# EAGLE board RGBDisplayDriver (EAGLE 7.3.0)
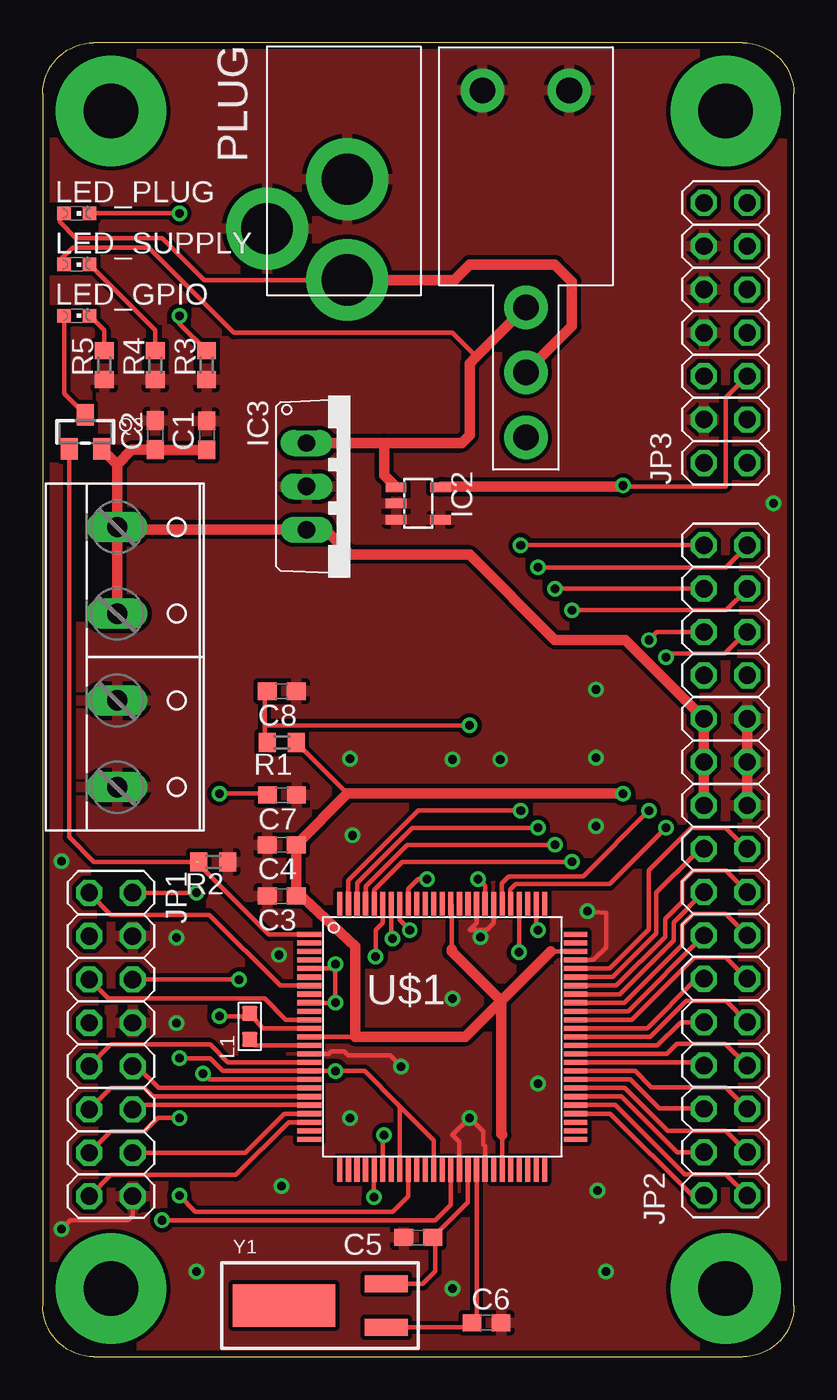
[diagram p0: board, top side]
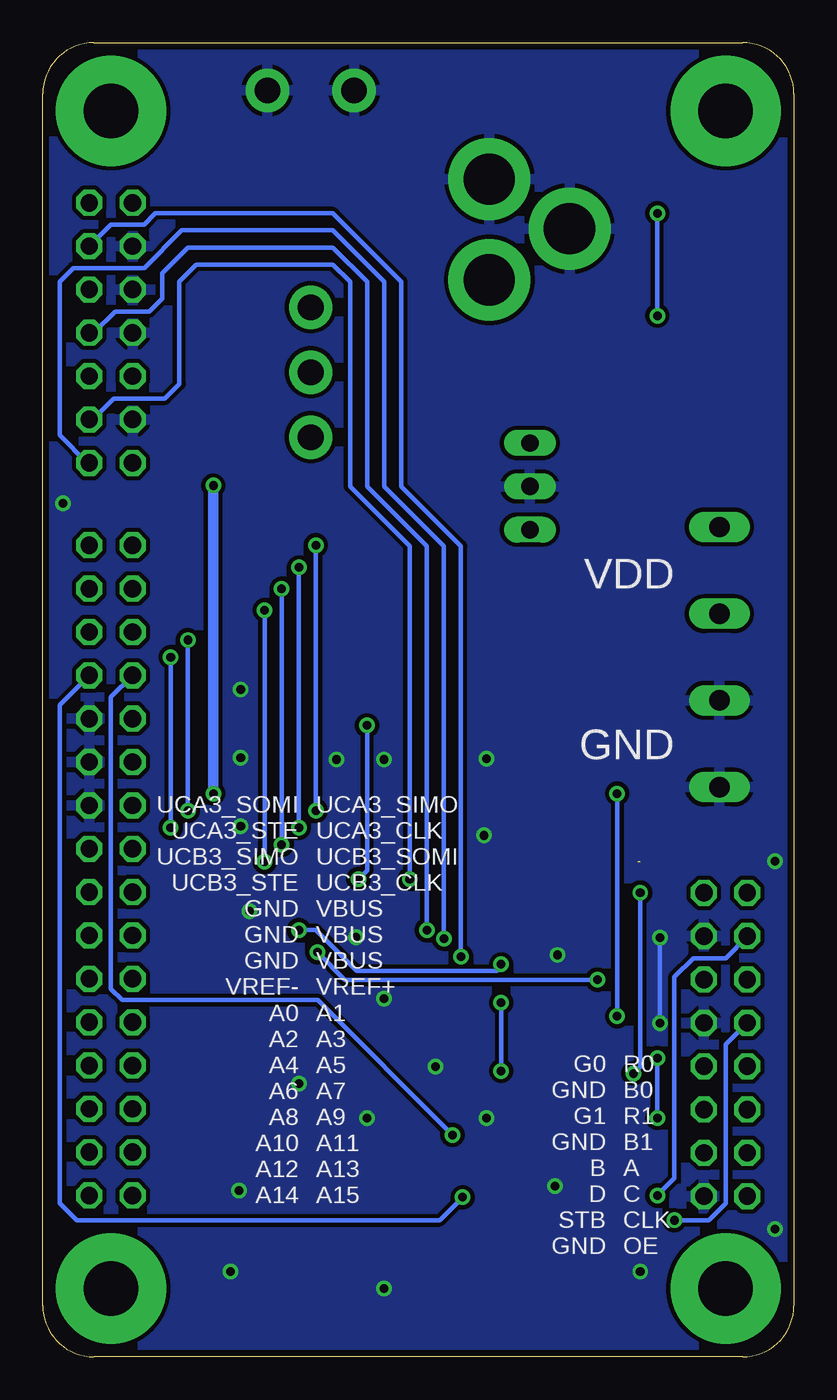
[diagram p1: board, bottom side, seen from below]

Size 44 x 77 mm. Coordinates in mm from the lower left corner, seen from the top.
Outline: 3,0 41,0 arc90 44,3 44,74 arc90 41,77 3,77 arc90 0,74 0,3 arc90 3,0
Copper layers (1*16): Top 0.035mm / dielectric 1.5mm / Bottom 0.035mm
Design rules "default *": minimum track width 6mil, minimum drill 13mil, track to track 6mil, track to pad 6mil, pad to pad 6mil, via to via 6mil, smd to smd 6mil, copper to edge 15mil, drill to drill 8mil, minimum pad ring 10mil, minimum via ring 8mil, stop-mask expansion 4mil, vias tented up to drill 20mil, thermal gap 10mil

## Footprints (pad centres in the part's own frame; a part is rotated, then mirrored left to right if it is on the bottom)
C0603 = smd 1.1 x 1: 1 -0.85,0; 2 0.85,0
SOT23-DBV = smd 0.55 x 1.2: 1 -0.95,-1.3; 2 0,-1.3; 3 0.95,-1.3; 4 0.95,1.3; 5 -0.95,1.3
TO220V = drill 1.016 long: 1 -2.54,-2.54; 2 0,-2.54; 3 2.54,-2.54
2X08 = drill 1.016 octagon: 1 -8.89,-1.27; 2 -8.89,1.27; 3 -6.35,-1.27; 4 -6.35,1.27; 5 -3.81,-1.27; 6 -3.81,1.27; 7 -1.27,-1.27; 8 -1.27,1.27; 9 1.27,-1.27; 10 1.27,1.27; 11 3.81,-1.27; 12 3.81,1.27; 13 6.35,-1.27; 14 6.35,1.27; 15 8.89,-1.27; 16 8.89,1.27
2X16 = drill 1.016 octagon: 1 -19.05,-1.27; 2 -19.05,1.27; 3 -16.51,-1.27; 4 -16.51,1.27; 5 -13.97,-1.27; 6 -13.97,1.27; 7 -11.43,-1.27; 8 -11.43,1.27; 9 -8.89,-1.27; 10 -8.89,1.27; 11 -6.35,-1.27; 12 -6.35,1.27; 13 -3.81,-1.27; 14 -3.81,1.27; 15 -1.27,-1.27; 16 -1.27,1.27; 17 1.27,-1.27; 18 1.27,1.27; 19 3.81,-1.27; 20 3.81,1.27; 21 6.35,-1.27; 22 6.35,1.27; 23 8.89,-1.27; 24 8.89,1.27; 25 11.43,-1.27; 26 11.43,1.27; 27 13.97,-1.27; 28 13.97,1.27; 29 16.51,-1.27; 30 16.51,1.27; 31 19.05,-1.27; 32 19.05,1.27
2X07 = drill 1.016 octagon: 1 -7.62,-1.27; 2 -7.62,1.27; 3 -5.08,-1.27; 4 -5.08,1.27; 5 -2.54,-1.27; 6 -2.54,1.27; 7 0,-1.27; 8 0,1.27; 9 2.54,-1.27; 10 2.54,1.27; 11 5.08,-1.27; 12 5.08,1.27; 13 7.62,-1.27; 14 7.62,1.27
L0603 = smd 0.889 x 0.889: 1 -0.762,0; 2 0.762,0
CHIPLED_0603 = smd 0.8 x 0.8: A 0,-0.75; C 0,0.75
SOT23-WIDE = smd 1 x 1.27: 1 -0.95,-1; 2 0.95,-1; 3 0,1
R0603 = smd 1 x 1.1: 1 -0.85,0; 2 0.85,0
LQFP100 = smd 1.4 x 0.3: 1 -7.8,6; 2 -7.8,5.5; 3 -7.8,5; 4 -7.8,4.5; 5 -7.8,4; 6 -7.8,3.5; 7 -7.8,3; 8 -7.8,2.5; 9 -7.8,2; 10 -7.8,1.5; 11 -7.8,1; 12 -7.8,0.5; 13 -7.8,0; 14 -7.8,-0.5; 15 -7.8,-1; 16 -7.8,-1.5; 17 -7.8,-2; 18 -7.8,-2.5; 19 -7.8,-3; 20 -7.8,-3.5; 21 -7.8,-4; 22 -7.8,-4.5; 23 -7.8,-5; 24 -7.8,-5.5; 25 -7.8,-6; 51 7.8,-6; 52 7.8,-5.5; 53 7.8,-5; 54 7.8,-4.5; 55 7.8,-4; 56 7.8,-3.5; 57 7.8,-3; 58 7.8,-2.5; 59 7.8,-2; 60 7.8,-1.5; 61 7.8,-1; 62 7.8,-0.5; 63 7.8,0; 64 7.8,0.5; 65 7.8,1; 66 7.8,1.5; 67 7.8,2; 68 7.8,2.5; 69 7.8,3; 70 7.8,3.5; 71 7.8,4; 72 7.8,4.5; 73 7.8,5; 74 7.8,5.5; 75 7.8,6 | smd 0.3 x 1.4: 26 -6,-7.8; 27 -5.5,-7.8; 28 -5,-7.8; 29 -4.5,-7.8; 30 -4,-7.8; 31 -3.5,-7.8; 32 -3,-7.8; 33 -2.5,-7.8; 34 -2,-7.8; 35 -1.5,-7.8; 36 -1,-7.8; 37 -0.5,-7.8; 38 0,-7.8; 39 0.5,-7.8; 40 1,-7.8; 41 1.5,-7.8; 42 2,-7.8; 43 2.5,-7.8; 44 3,-7.8; 45 3.5,-7.8; 46 4,-7.8; 47 4.5,-7.8; 48 5,-7.8; 49 5.5,-7.8; 50 6,-7.8; 76 6,7.8; 77 5.5,7.8; 78 5,7.8; 79 4.5,7.8; 80 4,7.8; 81 3.5,7.8; 82 3,7.8; 83 2.5,7.8; 84 2,7.8; 85 1.5,7.8; 86 1,7.8; 87 0.5,7.8; 88 0,7.8; 89 -0.5,7.8; 90 -1,7.8; 91 -1.5,7.8; 92 -2,7.8; 93 -2.5,7.8; 94 -3,7.8; 95 -3.5,7.8; 96 -4,7.8; 97 -4.5,7.8; 98 -5,7.8; 99 -5.5,7.8; 100 -6,7.8
PJ-102A = drill 3 pad 4.8: RING 0.1,-3.39; RING_SW -4.6,-6.29; TIP 0.1,-9.29
SWITCH-CK-7101MD9AV2BE = drill 1.5 pad 2.54: P$1 0,0; P$2 3.81,0; P$3 7.62,0; P$4 -12.7,2.54; P$5 -12.7,-2.54
W237-4P = drill 1.194 long: 1 -7.62,-0.635; 2 -2.54,-0.635; 3 2.54,-0.635; 4 7.62,-0.635
CRYSTAL_CYL_2X6MM_SMT = smd 2.5 x 1: 1 2.125,1.27; 2 2.125,-1.27 | smd 6 x 2.5: CYLINDER -3.875,0

## Placement (x,y rotation side)
C1  4.7 uF  [C0603]  9.62,53.99 90 top
C2  1 uF  [C0603]  6.6,54 90 top
C3  4.7 uF  [C0603]  14,27 180 top
C4  1 uF  [C0603]  14,30 180 top
C5  12 pF  [C0603]  22,7 180 top
C6  12 pF  [C0603]  26,2 0 top
C7  4.7 uF  [C0603]  14.02,32.92 180 top
C8  4.7 uF  [C0603]  14,39 180 top
IC2  TPS77033  [SOT23-DBV]  22,50 270 top
IC3  MIC29510-3.3WT  [TO220V]  18,51 270 top
JP1  [2X08]  4,18.3 270 top
JP2  [2X16]  40,28.5 270 top
JP3  [2X07]  40,60 90 top
L1  4.7 uH  [L0603]  12.13,19.36 90 top
LED_GPIO  696-SMLFM0603SRCTR  [CHIPLED_0603]  2,61 270 top
LED_PLUG  696-SMLFM0603SRCTR  [CHIPLED_0603]  2,67 270 top
LED_SUPPLY  696-SMLFM0603SRCTR  [CHIPLED_0603]  2,64 270 top
Q3  BSS84-T/R  [SOT23-WIDE]  2.5,54.2 0 top
R1  47k  [R0603]  14,36 180 top
R2  47k  [R0603]  10,29 180 top
R3  200  [R0603]  9.6,58.1 90 top
R4  100  [R0603]  6.6,58.1 90 top
R5  100  [R0603]  3.6,58.1 90 top
U$1  MSP432P401R  [LQFP100]  23.41,18.75 0 top
U$2  2.1MMJACKTHM  [PJ-102A]  17.74,72.39 0 top
U$3  SWITCH-CK-7101MD9AV2BE  [SWITCH-CK-7101MD9AV2BE]  28.3,61.5 270 top
X1  [W237-4P]  5,41 270 top
Y1  815-AB26T-32.768KHZ  [CRYSTAL_CYL_2X6MM_SMT]  18,3 0 top

## Library data of the parts
C1-C8 LED_GPIO LED_PLUG LED_SUPPLY U$2 = adafruit
IC2 = texas; MF: TEXAS INSTRUMENTS; MPN: TPS77033DBVT; OC_FARNELL: 8461570; OC_NEWARK: 77C1187
IC3 = linear
JP1-JP3 = pinhead
L1 = Seeed-OPL-Inductor; MPN: BLM18AG121SN1D
Q3 Y1 = microbuilder
R1-R5 = resistor
U$1 = MSP432P401x_EAGLE_LIB
U$3 = misc_components
X1 = con-wago-508; OC_FARNELL: unknown; OC_NEWARK: unknown

## Nets
A: JP1.9 U$1.16
A0: JP2.18 U$1.69
A1: JP2.17 U$1.68
A2: JP2.20 U$1.67
A3: JP2.19 U$1.66
A4: JP2.22 U$1.65
A5: JP2.21 U$1.64
A6: JP2.24 U$1.63
A7: JP2.23 U$1.62
A8: JP2.26 U$1.61
A9: JP2.25 U$1.60
A10: JP2.28 U$1.59
A11: JP2.27 U$1.58
A12: JP2.30 U$1.57
A13: JP2.29 U$1.56
A14: JP2.32 U$1.55
A15: JP2.31 U$1.54
B: JP1.10 U$1.19
B0: JP1.3 U$1.34
B1: JP1.7 U$1.39
C: JP1.11 U$1.20
D: JP1.12 U$1.21
G0: JP1.2 U$1.18
G1: JP1.6 U$1.79
GND!: C1.2 C2.2 C3.2 C4.2 C5.2 C6.2 C7.1 C8.1 IC2.2 IC2.3 IC2.4 IC3.2 JP1.4 JP1.8 JP1.16 JP2.10 JP2.12 JP2.14 JP3.4 JP3.8 JP3.10 JP3.12 R2.1 R3.1 R4.1 R5.1 U$1.15 U$1.40 U$1.43 U$1.72 U$1.82 U$1.84 U$2.RING U$2.RING_SW U$3.P$4 U$3.P$5 X1.3 X1.4
LED_DATA_CLK: JP1.13 U$1.5 U$1.9 U$1.17 U$1.33 U$1.37 U$1.77
LED_GPIO: Q3.1 R2.2 U$1.1
LFXIN: C5.1 U$1.41 Y1.1
LFXOUT: C6.1 U$1.42 Y1.2
N$1: LED_GPIO.A Q3.3
N$2: LED_PLUG.C R3.2
N$3: LED_SUPPLY.C R4.2
N$4: LED_GPIO.C R5.2
OE: JP1.15 U$1.23
R0: JP1.1 U$1.7
R1: JP1.5 U$1.11
RST_N: C8.2 R1.2 U$1.83
STB: JP1.14 U$1.22
TCK: JP3.11 U$1.95
TDI: JP3.3 U$1.92
TDO: JP3.7 U$1.93
TMS: JP3.1 U$1.94
UCA3_CLK: JP2.3 U$1.97
UCA3_SIMO: JP2.1 U$1.99
UCA3_SOMI: JP2.2 U$1.98
UCA3_STE: JP2.4 U$1.96
UCB3_CLK: JP2.7 U$1.31
UCB3_SIMO: JP2.6 U$1.80
UCB3_SOMI: JP2.5 U$1.81
UCB3_STE: JP2.8 U$1.30
V_PLUG: LED_PLUG.A U$2.TIP U$3.P$2
V_SUPPLY: IC2.1 IC3.1 LED_SUPPLY.A U$3.P$1
VBUS: C1.1 C2.1 IC3.3 JP2.9 JP2.11 JP2.13 Q3.2 X1.1 X1.2
VCC: C3.1 C4.1 IC2.5 JP3.5 R1.1 U$1.13 U$1.45 U$1.73 U$1.87
VCORE: C7.2 L1.2 U$1.12
VREF+: JP2.15 U$1.70
VREF-: JP2.16 U$1.71
VSW: L1.1 U$1.14

## Tracks (layer width: path | path; a pad name or v marks a point on that pad's centre or on a via)
A
  Top 0.254: JP1.9 4,18.3 9.8,18.3 10.85,17.25 U$1.16
A0
  Top 0.254: JP2.18 40,28.5 38.1,28.5 37.45,27.85 37.45,26.65 36.45,25.65 36.45,24.6 33.6,21.75 U$1.69
A1
  Top 0.254: U$1.68 33.8,21.25 36.95,24.4 36.95,25.45 JP2.17
A2
  Top 0.254: JP2.20 40,25.95 38.1,25.95 37.45,25.3 37.45,24.15 34.05,20.75 U$1.67
A3
  Top 0.254: U$1.66 34.29,20.25 JP2.19
A4
  Top 0.254: JP2.22 40.02,23.4 38.15,23.4 34.5,19.75 U$1.65
A5
  Top 0.254: U$1.64 35.4,19.25 38.2,22.05 38.63,22.05 JP2.21
A6
  Top 0.254: U$1.63 35.6,18.75 37.7,20.85 40.03,20.85 JP2.24
A7
  Top 0.254: U$1.62 36,18.25 37.36,19.61 JP2.23
A8
  Top 0.254: JP2.26 39.99,18.35 37.15,18.35 36.55,17.75 U$1.61
A9
  Top 0.254: JP2.25 38.55,17.25 U$1.60
A10
  Top 0.254: JP2.28 40,15.8 35.65,15.8 34.7,16.75 U$1.59
A11
  Top 0.254: JP2.27 38.71,14.55 36.1,14.55 34.4,16.25 U$1.58
A12
  Top 0.254: JP2.30 40.01,13.25 36.6,13.25 34.1,15.75 U$1.57
A13
  Top 0.254: JP2.29 37.16,11.99 33.9,15.25 U$1.56
A14
  Top 0.254: JP2.32 40.02,10.7 37.6,10.7 33.55,14.75 U$1.55
A15
  Top 0.254: U$1.54 33.25,14.25 38.05,9.45 JP2.31
B
  Top 0.254: JP1.10 5.52,17.03 6.8,15.75 U$1.19
B0  (via drill 0.5)
  Top 0.254: v8,9.45 8.95,8.5 20.5,8.5 21.41,9.41 U$1.34
  Bottom 0.254: JP1.3 2.73,24.62 4,23.35 5.9,23.35 7,22.25 7,10.45 v8,9.45
B1  (via drill 0.5)
  Top 0.254: v7,8 23,8 23.91,8.91 U$1.39
  Bottom 0.254: JP1.7 4,18.3 4,9 5,8 v7,8
C
  Top 0.254: JP1.11 3.99,15.75 5.95,15.75 6.45,15.25 U$1.20
D
  Top 0.254: JP1.12 5.53,14.75 U$1.21
G0  (via drill 0.5)
  Top 0.254: U$1.18 9.75,16.25 v9.4,16.6 | v9,27.2 v8.99,27.19 JP1.2
  Bottom 0.254: v9.4,16.6 9,17 v9,27.2
G1  (via drill 0.5)
  Top 0.254: JP1.6 v11.49,22.11 v11.5,22.1 | v27.9,23.7 U$1.79
  Bottom 0.254: v11.5,22.1 26.3,22.1 v27.9,23.7
GND!  (via drill 0.5)
  Top 0.254: 13.17,30.02 C4.2 | R3.1 9.62,57.23 | U$1.40 24.41,12.59 24,13 v25,14 25.8,13.2 25.8,12.45 25.91,12.34 U$1.43 | U$1.15 16.75,17.75 16.9,17.9 17.65,17.9 17.9,17.65 20.35,17.65 v21,17 | U$1.72 32.25,23.25 33,24 33,26 v31.9,26.1 | U$1.84 25.41,25.41 25,25 26,25 26.41,25.41 U$1.82 | v1.1,7.5 1.6,8 5,8 5.27,8.27 JP1.16
  Top 0.61: JP2.14 JP2.12 JP2.10
  Bottom 0.254: v7.85,19.55 v7.85,24.55
  other vias: 9,5 14,10 32.5,9.75 33,5 13.85,23.55 18.15,30.55 32.4,31.1 1.1,29.05 25.65,24.6 32.4,35.1 32.4,39.1 24,35 26.8,35 18,35.05 29,16 18,14 24,21 42.8,50 24,4
  pour Bottom (isolate 0.254): 0,74 arc-90 3,77 41,77 arc-90 44,74 44,3 arc-90 41,0 3,0 arc-90 0,3
  pour Top (isolate 0.254): 0,74 arc-90 3,77 41,77 arc-90 44,74 44,3 arc-90 41,0 3,0 arc-90 0,3
LED_DATA_CLK  (via drill 0.5)
  Top 0.254: JP1.13 3.98,13.2 5.95,13.2 6.75,14 v8,14 | v8,17.5 9.8,17.5 10.55,16.75 U$1.17 v17.15,16.75 18.85,16.75 20.8,14.8 20.91,14.69 | v29,25 28.91,25.09 U$1.77 | U$1.5 16.9,22.75 v17.15,23 v17.15,20.75 U$1.9 | 20.91,14.69 U$1.33 | U$1.37 22.91,12.69 20.91,14.69
  Bottom 0.254: v8,14 v8,17.5 | v29,25 28,25 25.6,22.6 17.4,22.6 17.15,22.85 v17.15,23 | v17.15,20.75 v17.15,16.75
LED_GPIO  (1 unrouted)
  Top 0.254: U$1.1 13.25,24.75 9,29 3,29 1.55,30.45 Q3.1
LFXIN
  Top 0.254: Y1.1 22.27,4.27 23,5 23,6.85 C5.1 24.91,9.06 U$1.41
LFXOUT
  Top 0.254: Y1.2 24.88,1.73 C6.1 25.41,2.26 U$1.42
N$1
  Top 0.254: Q3.3 1.25,56.45 LED_GPIO.A
N$2  (via drill 0.5)
  Top 0.254: R3.2 8,60.55 v8,61 | v8,67 LED_PLUG.C
  Bottom 0.254: v8,61 v8,67
N$3
  Top 0.254: LED_SUPPLY.C 6.6,60.15 R4.2
N$4
  Top 0.254: LED_GPIO.C 3.6,60.15 R5.2
N$5  (via drill 3.2 pad 6.45)
  other vias: 40,73
N$6  (via drill 3.2 pad 6.45)
  other vias: 4,4
N$7  (via drill 3.2 pad 6.45)
  other vias: 40,4
N$8  (via drill 3.2 pad 6.45)
  other vias: 4,73
OE
  Top 0.254: JP1.15 2.76,9.41 4,10.65 11.3,10.65 14.4,13.75 U$1.23
R0
  Top 0.254: JP1.1 2.73,27.17 4,25.9 9.75,25.9 13.9,21.75 U$1.7
R1
  Top 0.254: U$1.11 14.25,19.75 13,21 3.84,21 JP1.5
RST_N  (via drill 0.5)
  Top 0.254: U$1.83 25.91,27.59 v25.5,28 | 13,36.15 13,36 R1.2 13,36.15 | 13,36.15 13,37 | 13,37 13,39 C8.2 | v25,37 13,37
  Bottom 0.254: v25.5,28 25,28.5 v25,37
STB
  Top 0.254: U$1.22 14.15,14.25 11.85,11.95 JP1.14
TCK  (via drill 0.5)
  Top 0.254: U$1.95 19.91,25.41 19.5,25 v19.5,23.45
  Bottom 0.254: v19.5,23.45 19.5,47.5 23,51 23,63 27,67 37.4,67 38.05,66.35 40,66.35 JP3.11
TDI  (via drill 0.5)
  Top 0.254: U$1.92 21.41,27.41 22,28 v22.5,28
  Bottom 0.254: v22.5,28 22.5,47.5 26,51 26,63 27,64 35,64 36,63 36,57 36.85,56.15 39.85,56.15 41.08,54.92 JP3.3
TDO  (via drill 0.5)
  Top 0.254: U$1.93 20.91,25.59 v21.5,25
  Bottom 0.254: v21.5,25 21.5,47.5 25,51 25,63 27,65 35.5,65 37,63.5 37,62 37.75,61.25 39.75,61.25 41,60 JP3.7
TMS  (via drill 0.5)
  Top 0.254: U$1.94 20.41,24.59 v20.5,24.5
  Bottom 0.254: v20.5,24.5 20.5,47.5 24,51 24,63 27,66 35.85,66 38.05,63.8 42.2,63.8 43,63 43,54 41.38,52.38 JP3.1
UCA3_CLK  (via drill 0.5)
  Top 0.254: JP2.3 v30.01,45.01 v30,45 | v30,30 21.35,30 18.91,27.56 U$1.97
  Bottom 0.254: v30,45 v30,30
UCA3_SIMO  (via drill 0.5)
  Top 0.254: JP2.1 v28,47.55 | v28,32 22,32 17.91,27.91 U$1.99
  Bottom 0.254: v28,47.55 v28,32
UCA3_SOMI  (via drill 0.5)
  Top 0.254: JP2.2 41.27,47.52 40,46.25 v29,46.25 | v29,31 21.65,31 18.41,27.76 U$1.98
  Bottom 0.254: v29,46.25 v29,31
UCA3_STE  (via drill 0.5)
  Top 0.254: JP2.4 41.27,44.97 40.05,43.75 v31,43.75 | v31,29 21.05,29 19.41,27.36 U$1.96
  Bottom 0.254: v31,29 v31,43.75
UCB3_CLK  (via drill 0.5)
  Top 0.254: v20,13 19.91,12.91 U$1.31
  Bottom 0.254: JP2.7 40,38.66 40,21.55 39.35,20.9 27.9,20.9 v20,13
UCB3_SIMO  (via drill 0.5)
  Top 0.254: JP2.6 41.22,42.47 39.95,41.2 36.7,41.2 v36.5,41 | v36.5,31 33.2,27.7 27.7,27.7 27.4,27.4 U$1.80
  Bottom 0.254: v36.5,41 v36.5,31
UCB3_SOMI  (via drill 0.5)
  Top 0.254: JP2.5 35.97,42.47 v35.5,42 | v35.5,32 31.65,28.15 27.3,28.15 26.9,27.75 U$1.81
  Bottom 0.254: v35.5,42 v35.5,32
UCB3_STE  (via drill 0.5)
  Top 0.254: v19.4,9.35 U$1.30
  Bottom 0.254: JP2.8 43,38.2 43,9 42,8 20.75,8 v19.4,9.35
V_PLUG
  Top 0.254: LED_PLUG.A 1,66.75 1,66.5 1.95,65.55 7,65.55 9.45,63.1 U$2.TIP
  Top 0.61: U$3.P$2 31,60.39 31,63 30,64 25,64 24.1,63.1 U$2.TIP
V_SUPPLY
  Top 0.254: LED_SUPPLY.A 1,64.25 1.75,65 6.2,65 11.2,60 24,60 25.4,58.6
  Top 0.61: IC3.1 20,53.54 | IC2.1 20,51.65 20,53.54 | 20,53.54 24.54,53.54 25,54 25,58.2 25.4,58.6 U$3.P$1
VBUS
  Top 0.61: JP2.13 JP2.11 JP2.9 34.12,42 30,42 25,47 18,47 16.54,48.46 IC3.3 4.37,48.46 X1.1 | 4.37,52.28 X1.1 | C1.1 C2.1 5.23,53.15 4.37,52.28 | X1.2 X1.1 | Q3.2 4.37,52.28
VCC  (via drill 0.5)
  Top 0.254: U$1.45 26.91,13 26.91,20.91 | 29.75,23.75 U$1.73 | U$1.87 23.95,26.51 23.95,23.87 | U$1.13 18.3,18.75 | 17.85,33 R1.1 | v34,51.05 34.05,51 40,51 40,56.19 JP3.5
  Top 0.61: v34,51.05 34,51 23.35,51 IC2.5 | 26.85,20.85 24.75,18.75 18.3,18.75 18.3,24.05 15.3,26.85 15,26.85 C3.1 C4.1 17.85,33 v34,33 | 26.85,20.85 29.75,23.75 | 23.95,23.87 23.95,23.75 26.85,20.85 | 26.85,20.85 26.85,13.06 26.91,13
  Bottom 0.61: v34,33 v34,51.05
VCORE  (via drill 0.5)
  Top 0.254: U$1.12 12.9,19.25 L1.2 arc-90 11.96,19.95 v10.35,19.95 | v10.35,33 13.17,33 C7.2
  Bottom 0.254: v10.35,33 v10.35,19.95
VREF+
  Top 0.254: JP2.15 38.41,29.45 38.2,29.45 35.95,27.2 35.95,24.8 33.4,22.25 U$1.70
VREF-
  Top 0.254: JP2.16 41.23,29.77 40,31 38,31 35.5,28.5 35.5,25.05 33.2,22.75 U$1.71
VSW
  Top 0.254: L1.1 12.38,18.25 U$1.14

## Text on the board
tNames: PLUG
bNames: VDD | GND | UCA3_SIMO / UCA3_CLK / UCB3_SOMI / UCB3_CLK / VBUS / VBUS / VBUS / VREF+ / A1 / A3 / A5 / A7 / A9 / A11 / A13 / A15 | UCA3_SOMI / UCA3_STE / UCB3_SIMO / UCB3_STE / GND / GND / GND / VREF- / A0 / A2 / A4 / A6 / A8 / A10 / A12 / A14 | R0 / B0 / R1 / B1 / A / C / CLK / OE | G0 / GND / G1 / GND / B / D / STB / GND